# EAGLE board Controller V1.0 (EAGLE 8.4.1)
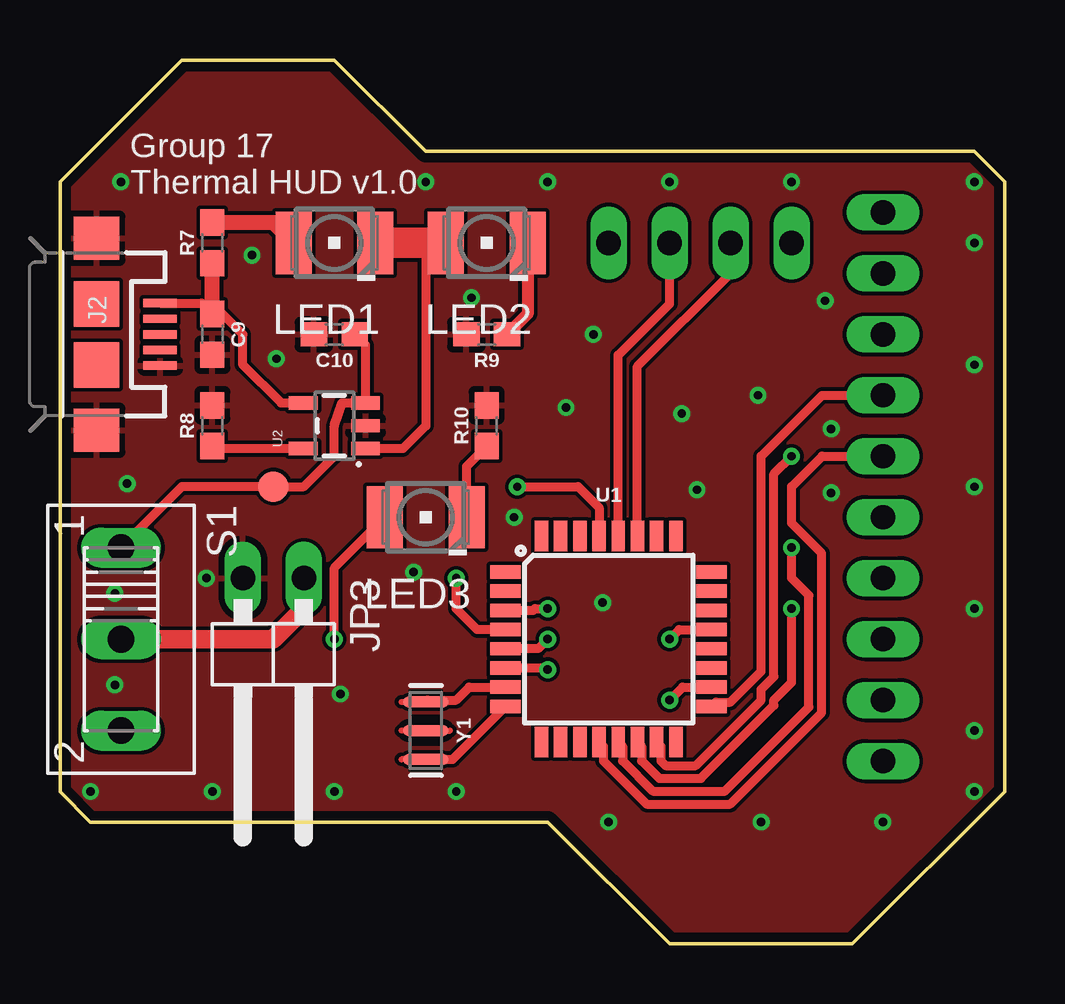
[diagram p0: board, top side]
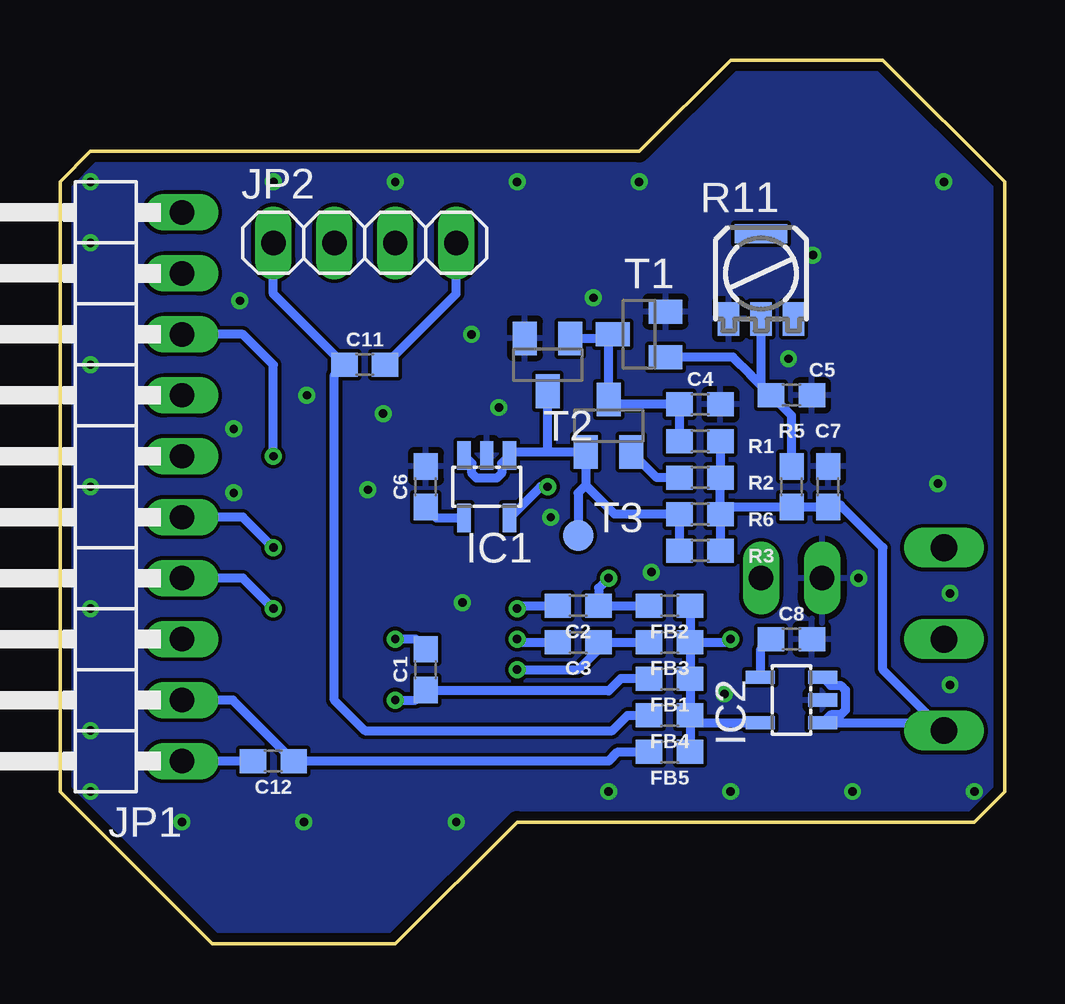
[diagram p1: board, bottom side, seen from below]

Size 39.37 x 36.83 mm. Coordinates in mm from the lower left corner, seen from the top.
Outline: 0,31.75 5.08,36.83 11.43,36.83 15.24,33.02 38.1,33.02 39.37,31.75 39.37,6.35 33.02,0 25.4,0 20.32,5.08 1.27,5.08 0,6.35 0,31.75
Copper layers (1*16): Top 0.0356mm / dielectric 1.5011mm / Bottom 0.0356mm
Design rules "oshpark-2layer": minimum track width 6mil, minimum drill 13mil, track to track 6mil, track to pad 6mil, pad to pad 6mil, via to via 6mil, smd to smd 6mil, copper to edge 15mil, drill to drill 6mil, minimum pad ring 7mil, minimum via ring 7mil, stop-mask expansion 2.5mil, vias tented up to drill 0mil, thermal gap 10mil

## Footprints (pad centres in the part's own frame; a part is rotated, then mirrored left to right if it is on the bottom)
0603 = smd 1.1 x 1: 1 -0.85,0; 2 0.85,0
SOT23-DBV = smd 0.55 x 1.2: 1 -0.95,-1.3; 2 0,-1.3; 3 0.95,-1.3; 4 0.95,1.3; 5 -0.95,1.3
USB-MICROB = smd 0.35 x 1.4: D+ 0,2.65; D- -0.65,2.65; GND 1.3,2.65; ID 0.65,2.65; VBUS -1.3,2.65 | smd 1.8 x 1.9: MT1 -4,0; MT2 4,0 | smd 1.9 x 1.9: P$1 -1.27,0; P$2 1.27,0
1X10/90 = drill 1.016 long: 1 -11.43,-3.81; 2 -8.89,-3.81; 3 -6.35,-3.81; 4 -3.81,-3.81; 5 -1.27,-3.81; 6 1.27,-3.81; 7 3.81,-3.81; 8 6.35,-3.81; 9 8.89,-3.81; 10 11.43,-3.81
1X04 = drill 1.016 long: 1 -3.81,0; 2 -1.27,0; 3 1.27,0; 4 3.81,0
1X02/90 = drill 1.016 long: 1 -1.27,-3.81; 2 1.27,-3.81
PLCC2 = smd 2.6 x 1.5: A 0,1.7; C 0,-1.7
PC25 = smd 2.2 x 0.8: 4 0,1.65 | smd 0.9 x 1.4: A -1.35,-1.9; E 1.35,-1.9; S 0,-1.9
255SB = drill 1.118 long: 1 -3.81,0; 2 0,0; 3 3.81,0
SOT23-BEC = smd 1 x 1.4: B -0.95,-1.1; C 0,1.1; E 0.95,-1.1
PAD.03X.05 = smd 1.27 x 1.27: P$1 0,0
TQFP32-08 = smd 1.27 x 0.559: 1 -4.293,2.8; 2 -4.293,2; 3 -4.293,1.2; 4 -4.293,0.4; 5 -4.293,-0.4; 6 -4.293,-1.2; 7 -4.293,-2; 8 -4.293,-2.8; 17 4.293,-2.8; 18 4.293,-2; 19 4.293,-1.2; 20 4.293,-0.4; 21 4.293,0.4; 22 4.293,1.2; 23 4.293,2; 24 4.293,2.8 | smd 0.559 x 1.27: 9 -2.8,-4.293; 10 -2,-4.293; 11 -1.2,-4.293; 12 -0.4,-4.293; 13 0.4,-4.293; 14 1.2,-4.293; 15 2,-4.293; 16 2.8,-4.293; 25 2.8,4.293; 26 2,4.293; 27 1.2,4.293; 28 0.4,4.293; 29 -0.4,4.293; 30 -1.2,4.293; 31 -2,4.293; 32 -2.8,4.293
SOT23-5 = smd 0.55 x 1.2: 1 -0.95,-1.3; 2 0,-1.3; 3 0.95,-1.3; 4 0.95,1.3; 5 -0.95,1.3
RESONATOR-SMD-3.2X1.3 = smd 0.45 x 1.905: 1 -1.2,0; 2 0,0; 3 1.2,0

## Placement (x,y rotation side)
C1  0.1uF  [0603]  24.13,11.43 90 bottom
C2  0.1uF  [0603]  17.78,14.1 180 bottom
C3  0.1uF  [0603]  17.78,12.57 180 bottom
C4  0.1uF  [0603]  12.7,22.48 0 bottom
C5  0.1uF  [0603]  8.89,22.86 0 bottom
C6  0.1uF  [0603]  24.13,19.05 90 bottom
C7  0.1uF  [0603]  7.37,19.05 90 bottom
C8  0.1uF  [0603]  8.89,12.7 0 bottom
C9  4.7uF  [0603]  6.35,25.4 270 top
C10  4.7uF  [0603]  11.43,25.4 180 top
C11  0.1uF  [0603]  26.67,24.13 0 bottom
C12  0.1uF  [0603]  30.48,7.62 180 bottom
FB1  30Ω/1.8A  [0603]  13.97,11.05 180 bottom
FB2  30Ω/1.8A  [0603]  13.97,14.1 180 bottom
FB3  30Ω/1.8A  [0603]  13.97,12.57 180 bottom
FB4  30Ω/1.8A  [0603]  13.97,9.53 180 bottom
FB5  30Ω/1.8A  [0603]  13.97,8 180 bottom
IC1  TPS77033  [SOT23-DBV]  21.59,19.05 180 bottom
IC2  TPS77033  [SOT23-DBV]  8.89,10.16 90 bottom
J2  USB-MICROB  [USB-MICROB]  1.52,25.4 270 top
JP1  [1X10/90]  38.1,19.05 90 bottom
JP2  [1X04]  26.67,29.21 0 bottom
JP3  [1X02/90]  8.89,11.43 180 top
LED1  LS_T679-D2E2-1  [PLCC2]  11.43,29.21 90 top
LED2  LG_T679-E1F1-1  [PLCC2]  17.78,29.21 90 top
LED3  LG_T679-E1F1-1  [PLCC2]  15.24,17.78 90 top
R1  10M  [0603]  12.7,20.95 0 bottom
R2  3.3M  [0603]  12.7,19.43 0 bottom
R3  47k  [0603]  12.7,16.38 0 bottom
R5  10M  [0603]  8.89,19.05 270 bottom
R6  400k  [0603]  12.7,17.91 0 bottom
R7  330  [0603]  6.35,29.21 90 top
R8  2k  [0603]  6.35,21.59 90 top
R9  330  [0603]  17.78,25.4 180 top
R10  330  [0603]  17.78,21.59 90 top
R11  [PC25]  10.16,27.94 0 bottom
S1  [255SB]  2.54,12.7 270 top
T1  [SOT23-BEC]  15.24,25.4 90 bottom
T2  [SOT23-BEC]  19.05,24.13 180 bottom
T3  MMBT3906LT1SMD  [SOT23-BEC]  16.51,21.59 0 bottom
TP1  TEST-POINT3X5  [PAD.03X.05]  17.78,17.02 0 bottom
TP2  TEST-POINT3X5  [PAD.03X.05]  8.89,19.05 0 top
U1  ATMEGA328P_TQFP  [TQFP32-08]  22.86,12.7 0 top
U2  MCP73831  [SOT23-5]  11.43,21.59 90 top
Y1  16MHz  [RESONATOR-SMD-3.2X1.3]  15.24,8.89 270 top

## Library data of the parts
C1-C12 = SparkFun-Capacitors; PROD_ID: CAP-08604
FB1-FB5 = SparkFun-Coils; PROD_ID: NDUC-07859
IC1 IC2 = texas; MF: TEXAS INSTRUMENTS; MPN: TPS77033DBVT; OC_FARNELL: 8461570; OC_NEWARK: 77C1187
J2 = SparkFun-Retired; PROD_ID: CONN-09505
JP1-JP3 = pinhead
LED1 = led; COLOR: super-red
LED2 LED3 = led; COLOR: green
R1-R3 R5-R10 = SparkFun-Resistors; PROD_ID: RES-08283
R11 = pot-vitrohm; MF: CLAROSTAT; MPN: 308NPC25KS; OC_FARNELL: 1440998; OC_NEWARK: 03F7518
S1 = switch
T1 T2 = transistor-neu-to92
T3 = transistor-pnp
TP1 TP2 = SparkFun-Connectors
U1 = SparkFun-IC-Microcontroller; PROD_ID: IC-09069
U2 = SparkFun-IC-Power; PROD_ID: IC-09995
Y1 = SparkFun-Clocks; PROD_ID: XTAL-08900

## Nets
AGND: C1.2 U1.21
AVCC: C1.1 FB1.2 U1.18
CAM_GND: C11.2 JP2.4
CAM_SCL: JP2.3 U1.28
CAM_SDA: JP2.2 U1.27
CAM_VCC: C11.1 FB4.2 JP2.1
GND: C4.2 C5.2 C6.2 C7.2 C8.2 C9.2 C10.2 IC1.2 IC2.2 J2.GND J2.MT1 J2.MT2 JP3.2 R8.2 R9.2 R10.2 R11.A T1.E T2.E U2.2 Y1.2
GND1: C2.2 U1.3
GND2: C3.2 U1.5
LIPO_POS: JP3.1 S1.2
N$1: IC1.1 IC1.3 R3.1 R6.1 T2.C T3.B TP1.P$1
N$2: C5.1 R5.1 R11.S T1.B
N$3: IC1.5 U1.29
N$4: C4.1 R1.1 T1.C T2.B T3.C
N$5: R2.1 T3.E
N$6: LED1.C LED2.A U2.1
N$7: C6.1 IC1.4
N$8: FB1.1 FB2.1 FB3.1 FB4.1 FB5.1 IC2.5 LED3.A
N$9: C8.1 IC2.4
N$10: LED1.A R7.2
N$11: C9.1 J2.VBUS R7.1 U2.4
N$12: R8.1 U2.5
N$13: C10.1 S1.1 TP2.P$1 U2.3
N$15: U1.7 Y1.1
N$16: U1.8 Y1.3
N$17: LED3.C R10.1
N$18: LED2.C R9.1
OLED_DC: JP1.6 U1.12
OLED_GND: C12.2 JP1.1
OLED_MOSI: JP1.8 U1.15
OLED_OC: JP1.4 U1.14
OLED_RESET: JP1.5 U1.13
OLED_SCK: JP1.7 U1.17
OLED_VCC: C12.1 FB5.2 JP1.2
VBAT: C7.1 IC2.1 IC2.3 R1.2 R2.2 R3.2 R5.2 R6.2 S1.3
VCC1: C2.1 FB2.2 U1.4
VCC2: C3.1 FB3.2 U1.6

## Tracks (layer width: path | path; a pad name or v marks a point on that pad's centre or on a via)
AGND  (via drill 0.35 pad 0.55)
  Top 0.381: v25.4,12.7 25.8,13.1 U1.21
  Bottom 0.381: C1.2 24.55,12.7 v25.4,12.7
AVCC  (via drill 0.35 pad 0.55)
  Top 0.381: U1.18 25.94,10.7 v25.4,10.16
  Bottom 0.381: v25.4,10.16 24.55,10.16 C1.1 24.09,10.54 16.51,10.54 16,11.05 FB1.2
CAM_GND
  Bottom 0.381: C11.2 22.86,27.09 JP2.4
CAM_SCL
  Top 0.381: U1.28 23.26,24.53 25.4,26.67 JP2.3
CAM_SDA
  Top 0.381: U1.27 24.06,24.06 27.94,27.94 JP2.2
CAM_VCC
  Bottom 0.381: JP2.1 30.48,27.09 C11.1 27.94,23.71 27.94,10.16 26.67,8.89 16.36,8.89 15.72,9.53 FB4.2
GND  (via drill 0.35)
  other vias: 2.54,31.75 15.24,31.75 20.32,31.75 25.4,31.75 30.48,31.75 38.1,31.75 38.1,29.21 38.1,24.13 38.1,19.05 38.1,13.97 38.1,8.89 38.1,6.35 34.29,5.08 29.21,5.08 22.86,5.08 16.51,6.35 11.43,6.35 6.35,6.35 1.27,6.35 2.29,10.79 2.29,14.61 2.79,19.18 9.02,24.38 8,28.7 22.23,25.4 21.08,22.35 25.91,22.1 26.54,18.92 22.61,14.22 29.08,22.86 32.13,21.46 32.13,18.8 31.88,26.8 17.14,26.92 11.68,10.41 6.1,15.24 18.92,17.78 14.73,15.49
  pour Bottom: 0,31.75 5.08,36.83 11.43,36.83 15.24,33.02 38.1,33.02 39.37,31.75 39.37,6.35 33.02,0 25.4,0 20.32,5.08 1.27,5.08 0,6.35
  pour Top: 0,31.75 5.08,36.83 11.43,36.83 15.24,33.02 38.1,33.02 39.37,31.75 39.37,6.35 33.02,0 25.4,0 20.32,5.08 1.27,5.08 0,6.35
GND1  (via drill 0.35)
  Top 0.152: 19.71,13.9 19.78,13.97
  Top 0.381: U1.3 19.71,13.9 | 19.78,13.97 v20.32,13.97
  Bottom 0.381: v20.32,13.97 20.19,14.1 C2.2
GND2  (via drill 0.35 pad 0.55)
  Top 0.381: v20.32,12.7 19.92,12.3 U1.5
  Bottom 0.381: v20.32,12.7 20.19,12.57 C3.2
LIPO_POS
  Top 0.762: S1.2 8.89,12.7 10.16,13.97 JP3.1
N$1
  Bottom 0.381: R3.1 R6.1 16.26,17.91 17.46,19.11 | IC1.3 22.21,20.02 22.21,19.61 22.01,19.41 21.17,19.41 20.97,19.61 20.97,20.02 IC1.1 20.5,20.49 19.05,20.49 | 19.05,20.49 T3.B 17.46,19.11 | 19.05,20.49 T2.C | 17.46,19.11 17.78,18.79 TP1.P$1
N$2
  Bottom 0.381: C5.1 10.16,23.28 R11.S | C5.1 10.06,23.18 | C5.1 8.89,22.01 R5.1 | C5.1 10.59,23.7 10.61,23.73 11.33,24.45 T1.B
N$3  (via drill 0.35 pad 0.55)
  Top 0.381: v19.05,19.05 21.59,19.05 22.46,18.18 U1.29
  Bottom 0.381: IC1.5 19.34,19.05 v19.05,19.05
N$4
  Bottom 0.381: R1.1 C4.1 16.3,22.48 T3.C 16.51,25.23 | T2.B 16.51,25.23 | T1.C 16.51,25.23
N$5
  Bottom 0.381: R2.1 14.5,19.43 T3.E
N$6
  Top 0.152: 15.24,29.21 LED2.A
  Top 0.381: 15.24,29.21 15.24,21.59 14.29,20.64 U2.1
  Top 1.27: LED1.C 15.24,29.21
N$7
  Bottom 0.381: C6.1 23.68,17.75 IC1.4
N$8  (via drill 0.35)
  Top 0.381: v11.43,12.7 11.43,15.67 LED3.A
  Bottom 0.381: FB4.1 FB1.1 FB3.1 | FB4.1 FB5.1 | FB2.1 FB3.1 | FB4.1 12.8,9.21 IC2.5 | FB3.1 11.56,12.57 v11.43,12.7
N$9
  Bottom 0.381: C8.1 10.19,12.25 IC2.4
N$10
  Top 0.635: R7.2 8.88,30.06 LED1.A
N$11
  Top 0.381: U2.4 9.21,22.54 7.62,24.13 7.62,25.4 6.35,26.67 C9.1 5.9,26.7 J2.VBUS
  Top 0.635: 6.35,26.67 R7.1
N$12
  Top 0.152: 6.45,20.64 R8.1
  Top 0.381: U2.5 6.45,20.64
N$13
  Top 0.381: C10.1 12.73,24.95 U2.3 11.75,22.54 11.43,21.59 11.43,20.32 10.16,19.05 TP2.P$1 5.08,19.05 S1.1
N$15
  Top 0.381: Y1.1 15.31,10.16 16.51,10.16 17.05,10.7 U1.7
N$16
  Top 0.381: Y1.3 16.36,7.69 U1.8
N$17
  Top 0.381: LED3.C 16.94,19.9 R10.1
N$18
  Top 0.508: LED2.C 19.48,26.25 R9.1
OLED_DC
  Top 0.381: U1.12 22.64,8.23 22.64,7.63 24.44,5.83 27.92,5.83 31.73,9.64 31.73,16.27 30.48,17.53 30.48,19.05 31.75,20.32 JP1.6
OLED_GND
  Bottom 0.381: C12.2 JP1.1
OLED_MOSI  (via drill 0.35 pad 0.55)
  Top 0.381: U1.15 25.04,8.23 25.04,7.63 25.24,7.43 26.48,7.43 29.21,10.16 29.21,10.6 29.74,11.14 29.74,19.58 v30.48,20.32
  Bottom 0.381: v30.48,20.32 30.48,24.13 31.75,25.4 JP1.8
OLED_OC  (via drill 0.35 pad 0.55)
  Top 0.381: U1.14 24.24,8.23 24.24,7.63 24.97,6.9 26.7,6.9 29.74,9.94 29.74,10.16 30.48,10.9 v30.48,13.97
  Bottom 0.381: v30.48,13.97 31.75,15.24 JP1.4
OLED_RESET  (via drill 0.35 pad 0.55)
  Top 0.381: U1.13 23.44,8.23 23.44,7.63 24.7,6.36 27.7,6.36 31.2,9.86 31.2,14.52 30.48,15.24 v30.48,16.51
  Bottom 0.381: v30.48,16.51 31.75,17.78 JP1.5
OLED_SCK
  Top 0.381: U1.17 27.33,10.08 27.93,10.08 29.21,11.36 29.21,20.32 31.75,22.86 JP1.7
OLED_VCC
  Bottom 0.381: JP1.2 32.17,10.16 C12.1 16.51,7.62 16.13,8 FB5.2
VBAT
  Bottom 0.381: R1.2 R2.2 R6.2 | R6.2 R3.2 | R6.2 11.43,18.2 R5.2 C7.1 6.95,18.2 6.86,18.29 5.08,16.51 5.08,11.43 S1.3 2.86,9.21 IC2.1 7.26,9.54 6.85,9.54 6.65,9.74 6.65,10.58 6.85,10.78 7.26,10.78 IC2.3
VCC1  (via drill 0.35 pad 0.55)
  Top 0.381: U1.4 17.38,13.1 16.51,13.97 v16.51,15.24
  Bottom 0.381: FB2.2 C2.1 16.93,14.82 v16.51,15.24
VCC2  (via drill 0.35 pad 0.55)
  Top 0.381: U1.6 20.25,11.5 v20.32,11.43
  Bottom 0.381: v20.32,11.43 17.78,11.43 16.93,12.28 C3.1 FB3.2

## Text on the board
tPlace: Group 17 / Thermal HUD v1.0